# Altium PCB Game_Consol.PcbDoc
Units mil, origin at the board's own origin, x right, y up, seen from the top; angles counter-clockwise.
Board outline 3090.55 x 1732.28 mil, 2 copper layers (Top Layer, Bottom Layer); 53 components, 42 nets, 214 pads, 111 vias.
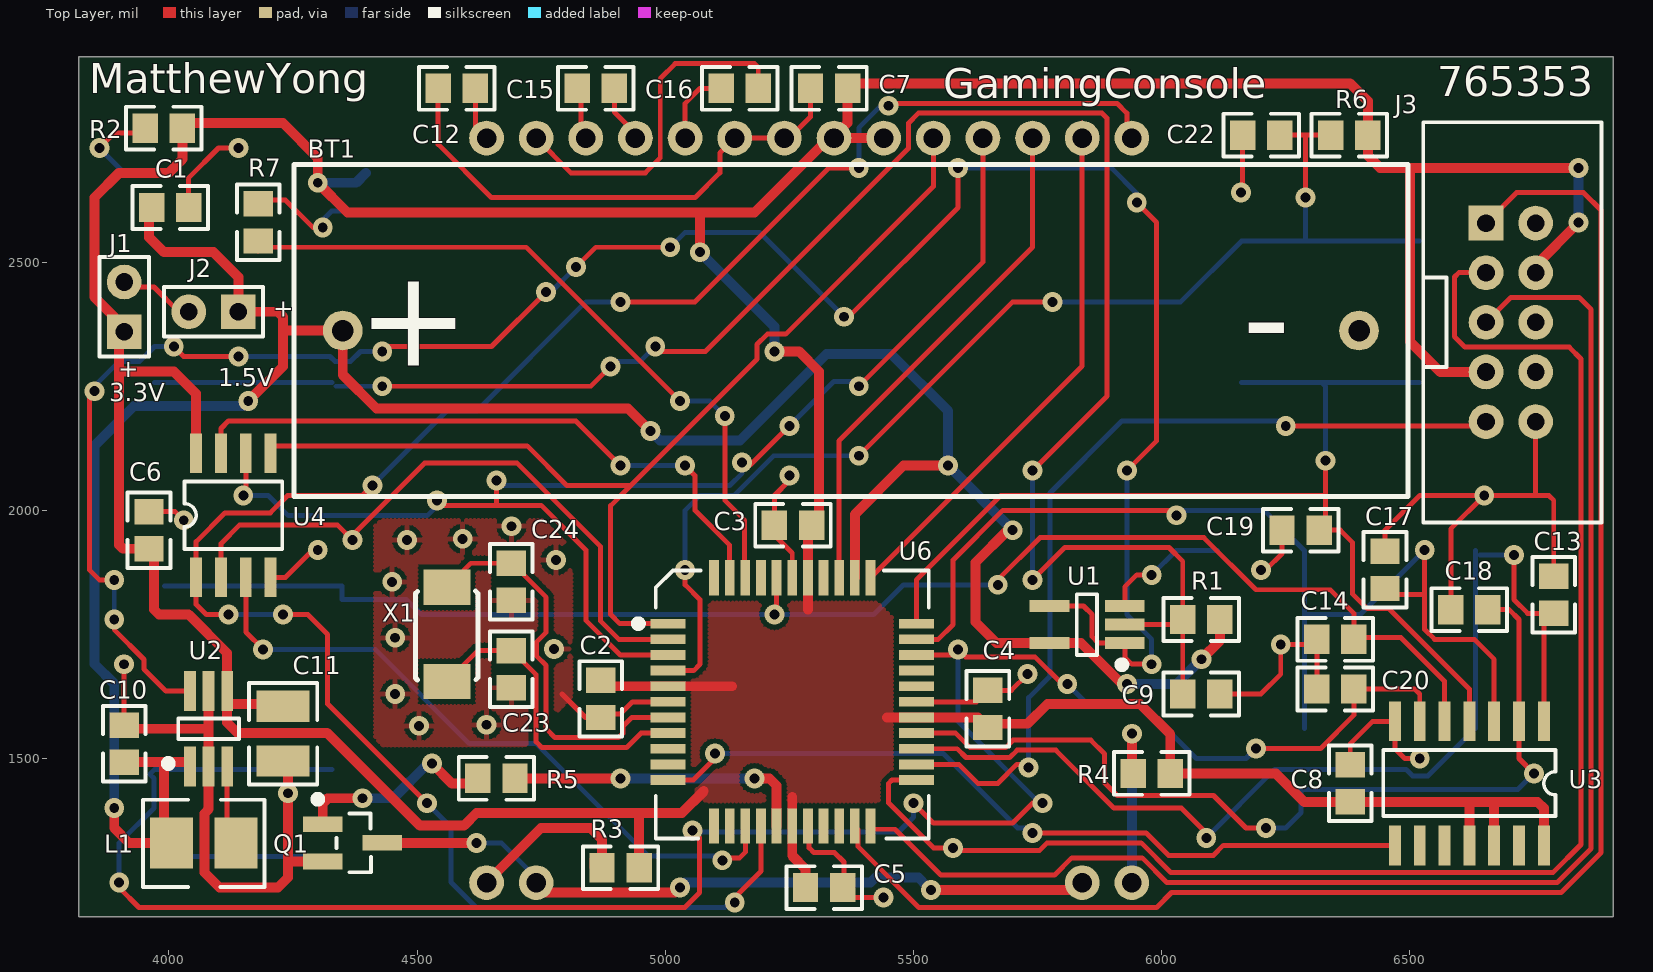
[diagram p0: Top Layer view]
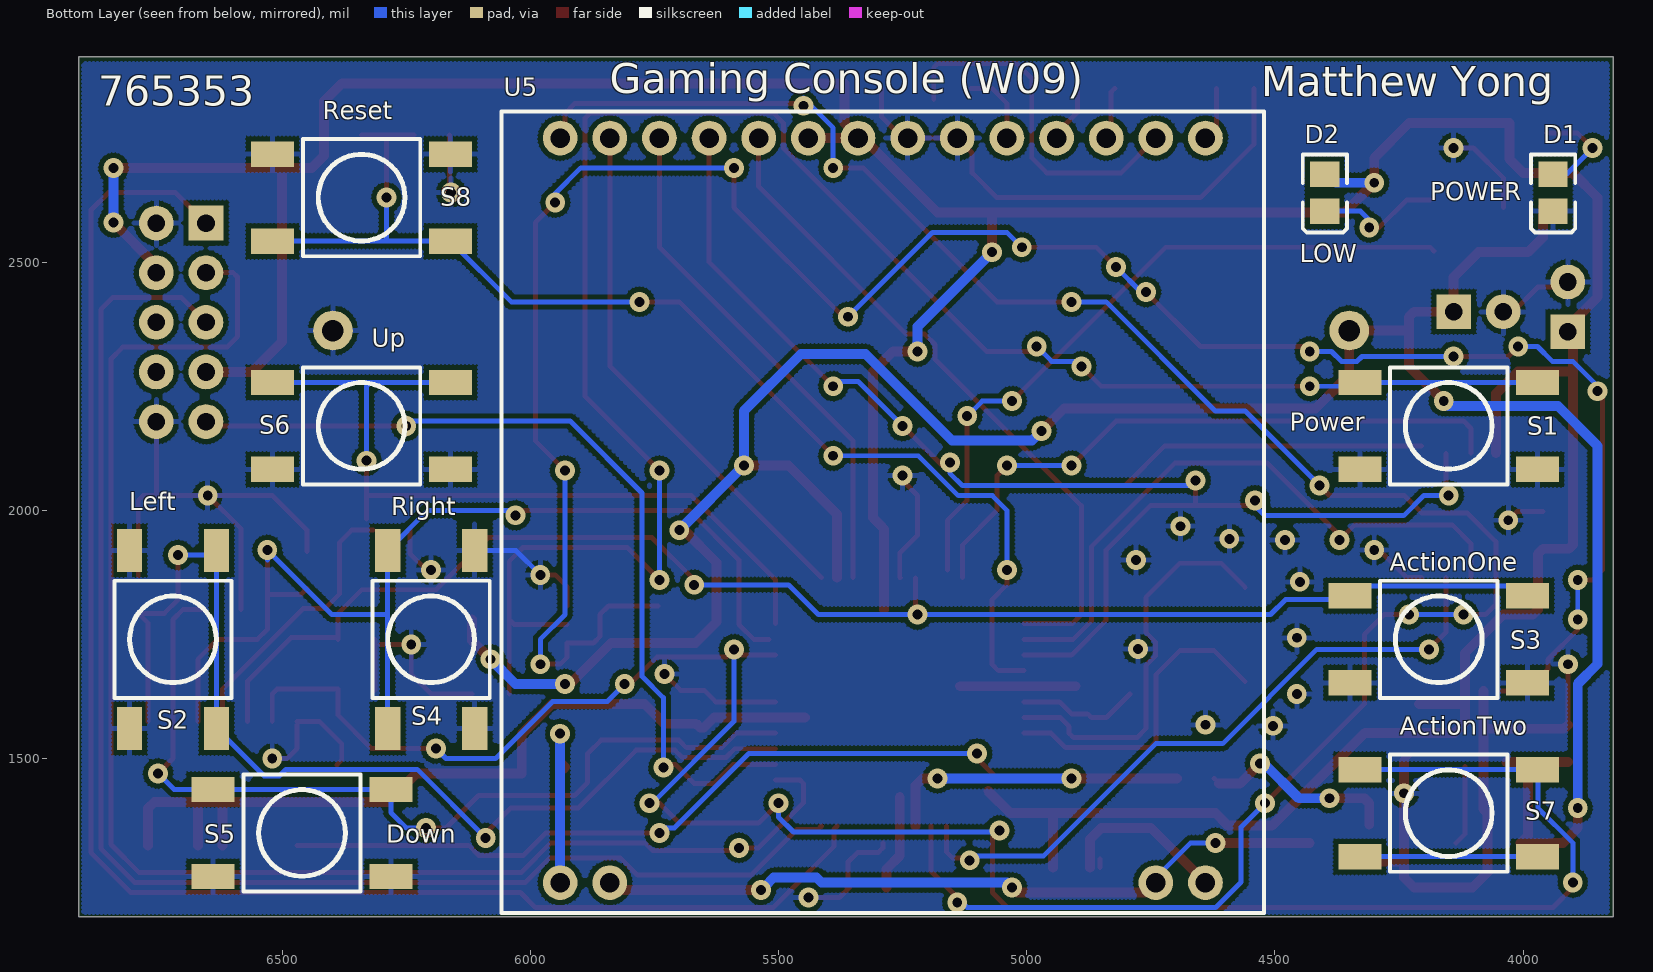
[diagram p1: Bottom Layer view, seen from below]
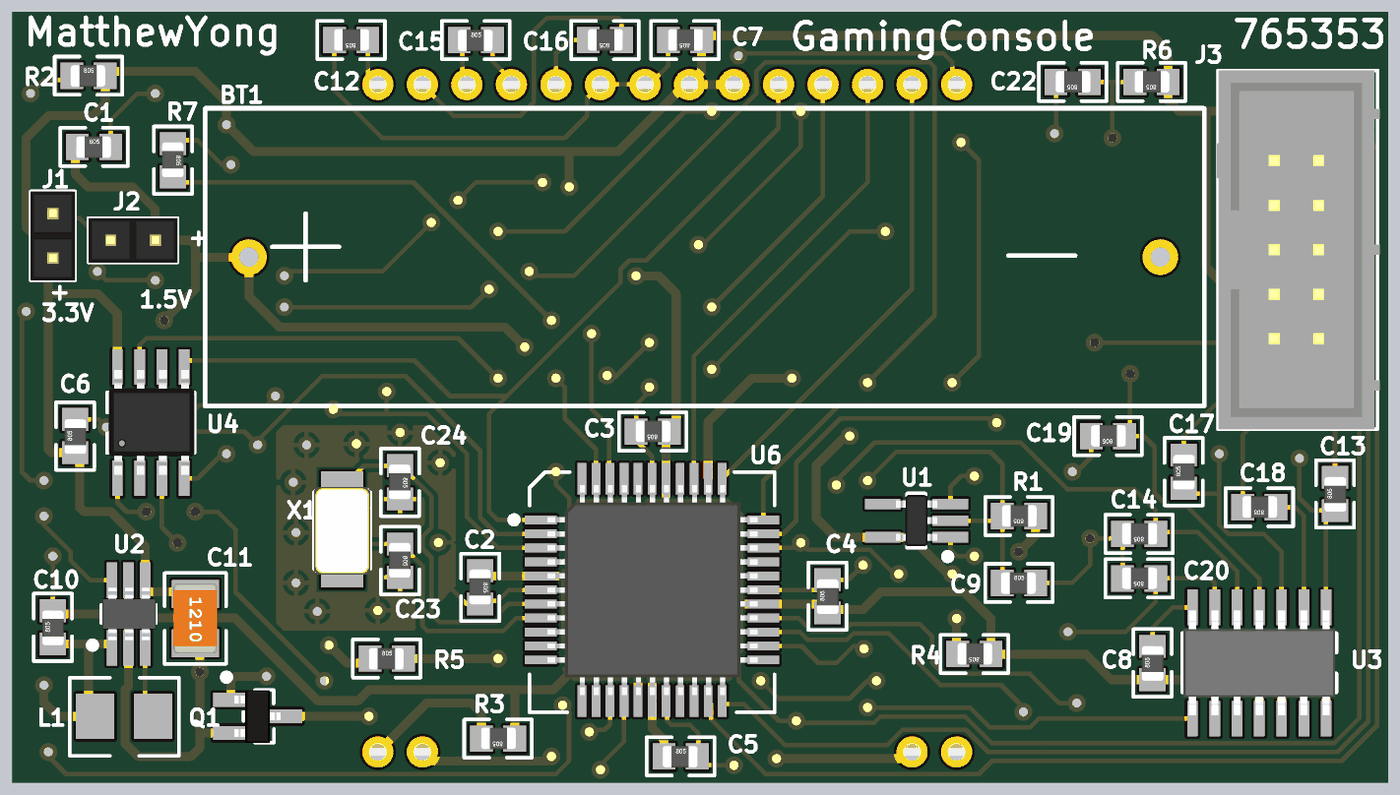
[diagram p2: 3D render of the assembled board from above, using the file's embedded part models]
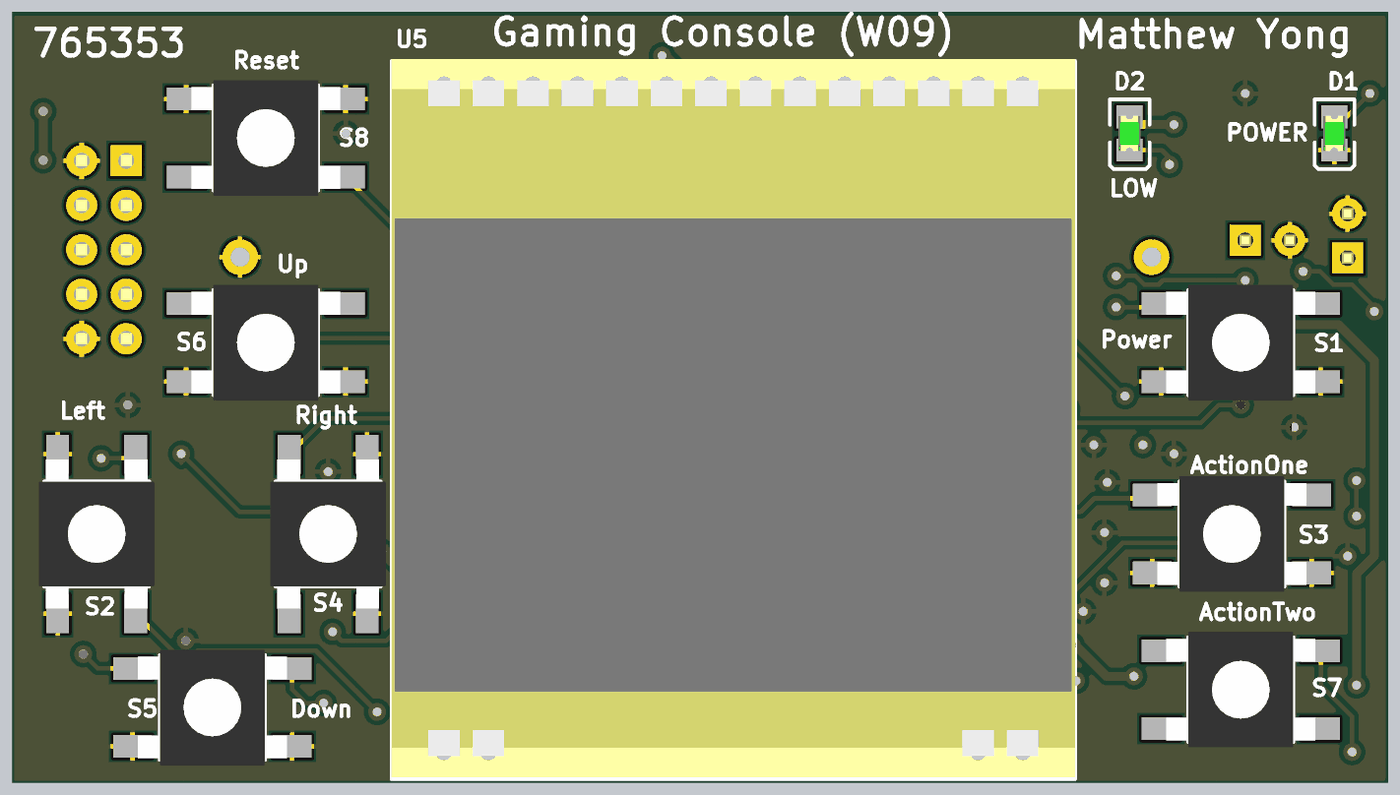
[diagram p3: 3D render of the assembled board from below, using the file's embedded part models]

## Layer stack, top to bottom
Top Solder: solder mask 0.4, Solder Resist, Dk 3.5
Top Layer: signal copper 1.4
Dielectric1: dielectric 12.6, FR-4, Dk 4.8
Bottom Layer: signal copper 1.4
Bottom Solder: solder mask 0.4, Solder Resist, Dk 3.5

## Board outline
3818.9,1181.1 3818.9,2913.39 6909.45,2913.39 6909.45,1181.1

## Design rules (kind name [scope] priority, off if disabled: settings)
Clearance [All] p1: gap=10
ComponentClearance [All] p1 off: gap=10 collisioncheckmode=3 verticalgap=10 showdistances=FALSE
DiffPairsRouting [All] p1: maxlimit=20 minlimit=10 mostfreqgap=10 toplayer_minwidth=15 toplayer_maxwidth=15 toplayer_prefwidth=15 bottomlayer_minwidth=15 bottomlayer_maxwidth=15 bottomlayer_prefwidth=15 maxuncoupledlength=500
FabricationTestPointUsage TestPointUsage [All] p1: valid=0 allowmultiple=FALSE
FabricationTestpoint Testpoint [All] p1: side=3 testpointundercomponent=TRUE minsize=40 maxsize=100 preferedsize=60 minholesize=0 maxholesize=40 preferedholesize=32 testpointgrid=1 allowsidetop=TRUE allowsidebottom=TRUE usegrid=TRUE gridtolerance=0.01
Height [All] p1: minheight=0 maxheight=7874.02 prefheight=500
HoleSize [All] p1: absolutevalues=TRUE maxlimit=199 minlimit=15 maxpercent=80.000 minpercent=20.000
MinimumAnnularRing [All] p1: minimumring=5
PolygonConnect [All] p1: connectstyle=Relief reliefconductorwidth=10 reliefentries=4 polygonreliefangle="90 Angle" airgapwidth=10
RoutingVias [All] p1: holewidth=20 width=40 viastyle="Through Hole" minholewidth=20 minwidth=40 maxholewidth=20 maxwidth=40
SilkToSolderMaskClearance SilkscreenOverComponentPads [IsPad] p1: minsilkscreentomaskgap=10 clearancetoexposedcopper=TRUE
SolderMaskExpansion [All] p1: expansion=6
Width [All] p1: maxlimit=1000 minlimit=6 preferedwidth=10 minimp=50.000000 maximp=50.000000 favimp=50.000000
23 further rules are at their usual default settings.

## Classes and differential pairs
component class Game_Consol_Top: C12 C13 C14 C15 C16 C17 C18 C19 C20 C22 C23 C24 D2 J3 Q1 R3 R4 R5 R6 R7 S2 S3 S4 S5 S6 S7 S8 U3 U4 U5 U6 X1
component class Game_Consol_Power: BT1 C1 C2 C3 C4 C5 C6 C7 C8 C9 C10 C11 D1 J1 J2 L1 R1 R2 S1 U1 U2

## Components (designator, comment, footprint, x,y, rotation, side; value= is the part's Value field where it differs from the comment)
BT1 "1.5v" BATT_HOLDER 5374.02,2362.2 r180 top
C1 "100nF" 0805 4002.6,2610 r0 top
C2 "100nF" 0805 4870,1620 r270 top
C3 "100nF" 0805 5257.4,1970 r180 top
C4 "100nF" 0805 5650,1600 r90 top
C5 "100nF" 0805 5320,1240 r0 top
C6 "100nF" 0805 3960,1960 r90 top
C7 "100nF" 0805 5330,2850 r180 top
C8 "100nF" 0805 6380,1450 r90 top
C9 "100nF" 0805 6080,1630 r0 top
C10 "1uF" 0805 3910,1530 r90 top
C11 "22uF" 1210 4230,1550 r270 top
C12 "1uF" 0805 4580,2850 r180 top
C13 "100nF" 0805 6790,1830 r90 top
C14 "100nF" 0805 6350,1740 r180 top
C15 "1uF" 0805 4860,2850 r0 top
C16 "1uF" 0805 5150,2850 r180 top
C17 "100nF" 0805 6450,1880 r90 top
C18 "100nF" 0805 6620,1800 r180 top
C19 "100nF" 0805 6280,1960 r180 top
C20 "100nF" 0805 6350,1640 r180 top
C22 "100nF" 0805 6200.79,2755.91 r180 top
C23 "18pF" 0805 4690,1680 r270 top
C24 "18pF" 0805 4690,1856 r270 top
D1 "POWER" 0805D 3940,2640 r90 bottom
D2 "LOW" 0805D 4400,2640 r90 bottom
J1 "3.3V" HDR1X2 3910,2360 r90 top
J2 "1.5V" HDR1X2 4140,2400 r180 top
J3 "JTAG" BOXEDVERT10 6653.54,2578.74 r270 top
L1 "4.7uH" 1210L 4070,1330 r180 top
Q1 "RTR025N03TL" SOT23 4370,1330 r0 top
R1 "10k" 0805 6080,1780 r180 top
R2 "10k" 0805 3990,2770 r0 top
R3 "50" 0805 4910,1280 r180 top
R4 "50" 0805 5980,1470 r180 top
R5 "15" 0805 4660,1460 r0 top
R6 "10k" 0805 6377.95,2755.91 r180 top
R7 "10k" 0805 4180,2580 r270 top
S1 "Power" SPNO_SMD 4150,2170 r180 bottom
S2 "Left" SPNO_SMD 6720,1740 r270 bottom
S3 "ActionOne" SPNO_SMD 4170,1740 r180 bottom
S4 "Right" SPNO_SMD 6200,1740 r90 bottom
S5 "Down" SPNO_SMD 6460,1350 r180 bottom
S6 "Up" SPNO_SMD 6340,2170 r180 bottom
S7 "ActionTwo" SPNO_SMD 4150,1390 r180 bottom
S8 "Reset" SPNO_SMD 6340,2630 r0 bottom
U1 "74AUG1G80" SOT23-5 5850,1770 r180 top
U2 "SC120" SOT23-6 4080,1560 r90 top
U3 "74AHC30" SOIC-14 6620,1450 r270 top
U4 "FM25L04B" SOIC-8 4130,1990 r90 top
U5 "EA DOGS102x-6" "EA DOGS102x" 5290,2000 r180 bottom
U6 "ATMEGA16" QFP-48 5255.91,1614.17 r0 top
X1 "8Mhz" XTAL_FLAT_SMD 4560,1750 r90 top

## Footprints (in the part's own frame and the unit in brackets; to place one, negate y for a bottom-side part, rotate by r counter-clockwise, add the part's x,y. Pads: shape width x height; smd on the part's side, far side on the other; paste and mask are expansions set on the pad)
0805 [mm] "0805 Footprint"
  rect 1.3x1.5 smd: 1(-0.95,0) 2(0.95,0)
  silkscreen extent -1.93,-1.09 1.93,1.09, body extent -1.03,-0.64 0.97,0.61, height 0.8
0805D [mm] "0805 Diode"
  rect 1.3x1.5 smd: A(0.95,0) K(-0.95,0)
  silkscreen extent -2.03,-1.14 1.95,1.12, body extent -1.01,-0.62 1.01,0.63, height 1.1
1210 [mm]
  rect 1.6x2.7 smd: 1(-1.4,0) 2(1.4,0)
  silkscreen extent -2.6,-1.75 2.6,1.75, body extent -2,-1.24 2,1.24, height 1.72
1210L [mm] "Precision Wire Wound Inductor, 2-Leads, Body 3.2x3.2mm, IPC Low Density"
  rect 2.2x2.6 smd: 1(-1.651,0) 2(1.651,0)
  silkscreen extent -3.12,-2.21 3.1,2.26, body extent -1.75,-1.75 1.75,1.75, height 2.2
BATT_HOLDER [mil]
  round 80 hole 43.31: 1(1023.62,0) 2(-1023.62,0)
  silkscreen extent -1122,-335 1122,335
BOXEDVERT10 [mil] "IDC Header 2.54mm Boxed 10 pins"
  rect 70x70 hole 35.43: 1(0,0)
  round 70 hole 35.43: 2(0,100) 3(100,0) 4(100,100) 5(200,0) 6(200,100) 7(300,0) 8(300,100) 9(400,0) 10(400,100)
  silkscreen extent -203,-127 603,232, body extent -204,-129 604,237, height 359
"EA DOGS102x" [mil] "graphics display footprint"
  round 70 hole 39.37: 1(-650,-750) 2(-550,-750) 13(550,-750) 14(650,-750) 15(650,750) 16(550,750) 17(450,750) 18(350,750) 19(250,750) 20(150,750) 21(50,750) 22(-50,750) 23(-150,750) 24(-250,750) 25(-350,750) 26(-450,750) 27(-550,750) 28(-650,750)
  silkscreen extent -768,-811 768,803, body extent -768,-807 768,807, height 213
HDR1X2 [mil] "Connector; Header; 2 Position"
  rect 70x70 hole 35.43: 1(0,0)
  round 70 hole 35.43: 2(100,0)
  silkscreen extent -50,-50 150,50, body extent -50,-50 150,50, height 333
QFP-48 [mm]
  rect 1.8x0.5 smd: 1(-6.35,4) 2(-6.35,3.2) 3(-6.35,2.4) 4(-6.35,1.6) 5(-6.35,0.8) 6(-6.35,0) 7(-6.35,-0.8) 8(-6.35,-1.6) 9(-6.35,-2.4) 10(-6.35,-3.2) 11(-6.35,-4) 23(6.35,-4) 24(6.35,-3.2) 25(6.35,-2.4) 26(6.35,-1.6) 27(6.35,-0.8) 28(6.35,0) 29(6.35,0.8) 30(6.35,1.6) 31(6.35,2.4) 32(6.35,3.2) 33(6.35,4)
  rect 0.5x1.8 smd: 12(-4,-6.35) 13(-3.2,-6.35) 14(-2.4,-6.35) 15(-1.6,-6.35) 16(-0.8,-6.35) 17(0,-6.35) 18(0.8,-6.35) 19(1.6,-6.35) 20(2.4,-6.35) 21(3.2,-6.35) 22(4,-6.35) 34(4,6.35) 35(3.2,6.35) 36(2.4,6.35) 37(1.6,6.35) 38(0.8,6.35) 39(0,6.35) 40(-0.8,6.35) 41(-1.6,6.35) 42(-2.4,6.35) 43(-3.2,6.35) 44(-4,6.35)
  silkscreen extent -8,-6.98 6.98,6.73, body extent -5.97,-6 6.03,6, height 1.13
SOIC-8 [mil] "SOIC-8 Footprint"
  rect 80x24 smd: 1(-125,75) 2(-125,25) 3(-125,-25) 4(-125,-75) 5(125,-75) 6(125,-25) 7(125,25) 8(125,75)
  silkscreen extent -68,-98 68,98, body extent -117,-98 119,94, height 67
SOIC-14 [mil] "SOIC-14 Footprint"
  rect 80x24 smd: 1(-125,150) 2(-125,100) 3(-125,50) 4(-125,0) 5(-125,-50) 6(-125,-100) 7(-125,-150)
  rect 80x24.02 smd: 8(125,-150) 9(125,-100) 10(125,-50) 11(125,0) 12(125,50) 13(125,100) 14(125,150)
  silkscreen extent -67,-173 66,173, body extent -118,-170 118,170, height 61
SOT23 [mil] "SOT23, 3-Leads, Body 3.0x2.5mm (max), Pitch 0.95mm, IPC Low Density"
  rect 80.24x31.5 smd: 1(-60,37.4)
  rect 80x31.5 smd: 2(-60,-37.4) 3(60,0)
  silkscreen extent -75,-59 37,93, body extent -52,-59 52,59, height 43
SOT23-5 [mm]
  rect 2.032x0.6 smd: 1(-1.929,0.95) 2(-1.929,0) 3(-1.929,-0.95) 4(1.929,-0.95) 5(1.929,0.95)
  silkscreen extent -1.9,-1.55 0.53,2.18, body extent -1.17,-1.46 1.17,1.46, height 1.02
SOT23-6 [mm]
  rect 2.032x0.6 smd: 1(-1.929,0.95) 2(-1.929,0) 3(-1.929,-0.95) 4(1.929,-0.95) 5(1.929,0) 6(1.929,0.95)
  silkscreen extent -1.9,-1.55 0.53,2.18, body extent -1.5,-1.56 1.5,1.49, height 1.42
SPNO_SMD [mm] "SP NO SMD Tactile switch"
  rect 2.2x1.3 smd: 1(-4.55,-2.225) 2(4.55,-2.225) 3(-4.55,2.225) 4(4.55,2.225)
  silkscreen extent -3,-3 3,3, body extent -4.25,-3.3 4.25,3.3, height 4.32
XTAL_FLAT_SMD [mm]
  rect 1.8x2.4 smd: 1(-2.412,0) 2(2.413,0)
  silkscreen extent -2.33,-1.59 2.21,1.6, body extent -2.58,-1.6 2.42,1.6, height 1.02

## Part data
BT1: library part BAT, "Battery Holder AA 1.5v"
C1 C2 C3 C4 C5 C6 C7 C8 C9 C10 C12 C13 C14 C15 C16 C17 C18 C19 C20 C22 C23 C24: library part "C 0805", "Capacitor 100nF"
C11: library part "C 1210", "Capacitor 22uF"
D1: library part "LED GREEN", "Light Emitting Diode"
D2: library part "LED RED", "Light Emitting Diode"
J1 J2: library part HDR2, "2 Pin Header"
J3: library part JTAG_CON, "JTAG ATMEL connector"
L1: library part "I 1210", "Inductor 4.7uH"
Q1: library part MOSFET-N, "N-Channel MOSFET"
R1 R2 R3 R4 R5 R6 R7: library part R, "Resistor"
S1 S2 S3 S4 S5 S6 S7 S8: library part SW-PB, "Push Button Switch"
U1: "Inverted single D flip flop"
U2: "Regulator Low Voltage"
U3: "1 x 8 Input NAND gate"
U4: "FRAM 4Kb Memory"
U5: "LCD 102x64-pixel with backlight"
U6: "ATMEGA16 Microcontroller"
X1: library part XTAL, "Crystal Oscillator"

## Via types
v1: diameter 40, hole 20, Top Layer to Bottom Layer, tented both sides, 111 vias

## Nets (pads, with @x,y where several pads share a name; then routed paths per layer and width w, separated by ;. In a path a pad name is that pad's centre, name@x,y a point inside that pad or via, vN(x,y) a via of type N, cw(c..) or ccw(c..) an arc to the next point about the centre after c; other vN are vias at no path point)
A1+: R4.2 U5.1 | length 369.4
  Top Layer w10: R4.2@5940,1472.6 R4.2
  Top Layer w20: R4.2@5940,1472.6 5930,1482.6 5940,1492.6 v1(5940,1550)
  Bottom Layer w20: U5.1@5940,1270 v1(5940,1550)
A2+: R3.2 U5.14 | length 362.3
  Top Layer w10: R3.2@4852.6,1280 R3.2@4852.6,1297.4
  Top Layer w20: U5.14 4750,1360 4850,1360 4872.6,1337.4 R3.2
ACTIONONE: C14.1 S3.3 S3.4 U3.5 U6.40 | length 2999.2
  Top Layer w10: v1(5220,1790) 5222.82,1790 5224.41,1788.41 U6.40 ; v1(5670,1850) 5670,1860 5755,1945 6085,1945 6190,1840 6340,1840 6387.4,1792.6 C14.1 ; C14.1@6391.15,1743.75 6482.03,1743.75 6570,1655.78 U3.5
  Bottom Layer w10: S3.4@3990.87,1847.6 4349.13,1847.6 4349.13,1820 4478.87,1820 4508.87,1790 v1(5220,1790) 5420,1790 5480,1850 v1(5670,1850)
ACTIONTWO: C20.1 S7.3 S7.4 U3.6 U6.31 | length 4381
  Top Layer w10: v1(3900,1250) 3900,1240 3940,1200 5039.5,1200 5069.5,1230 5069.5,1340.5 v1(5055,1355) ; v1(5500,1410) 5540,1370 5700,1370 5740,1410 v1(5760,1410) ; U6.31 v1@5578.66,1708.66 ; v1(5590,1720) 5605,1705 5744.5,1705 5799.5,1650 v1(5810,1650) ; v1(6190,1520) 6320,1520 6387.4,1587.4 C20.1 6510,1640 6520,1630 U3.6
  Bottom Layer w10: v1(3900,1250) 3900,1330 3970,1400 3970,1460 3961.63,1468.37 S7.4 S7.3 ; v1(5055,1355) 5055,1365 5068,1352 5470,1352 5500,1382 v1(5500,1410) ; v1(5590,1720) 5590,1574.52 5754.52,1410 v1(5760,1410) ; v1(5810,1650) 5845,1615 5955,1615 6070,1500 6170,1500 v1(6190,1520)
"BUTTON INTERRUPT": U3.8 U6.11 | length 1581.1
  Top Layer w10: U6.11 5056.69,1456.69 5100,1500 v1(5100,1510) ; v1(5740,1350) 5968.99,1350 6013.99,1305 6104.5,1305 6124.5,1325 U3.8
  Bottom Layer w10: v1(5100,1510) 5560,1510 5710,1360 v1@5740,1360
CD: U5.26 U6.36 | length 1067
  Top Layer w10: U6.36@5350,1864.57 5350,2140 5740,2530 U5.26@5740,2770
CS: U4.1 U5.28 U6.15 | length 4149.1
  Top Layer w10: v1(4120,1790) 4075.36,1790 4055,1810.36 U4.1 4055,1937 4113,1995 4204.5,1995 4239.5,2030 4390,2030 v1(4410,2050) ; v1(4230,1790) 4280,1790 4320,1750 4320,1610 v1(4520,1410) ; v1(4910,2420) 5060,2420 5330,2690 v1(5390,2690) ; v1(5140,1210) 5140,1220 5192.91,1272.91 U6.15 ; v1(5450,2815) 5455,2820 5910,2820 5930,2800 5930,2760 U5.28
  Bottom Layer w10: v1(4120,1790) v1(4230,1790) ; v1(4410,2050) 4560,2200 4620,2200 4840,2420 v1(4910,2420) ; v1(4520,1410) 4568.08,1361.92 4568.08,1251.21 4619.29,1200 5120,1200 5130,1210 v1(5140,1210) ; v1(5390,2690) 5390,2770.71 v1@5439.29,2820 ; v1(5450,2815) v1@5450,2830.71
DOWNSWITCH: C18.1 S5.3 S5.4 U3.2 U6.26 | length 1847.3
  Top Layer w10: U6.26 5585.09,1551.18 5614.26,1522.01 5685.74,1522.01 5700.74,1537.01 5857.34,1537.01 5885,1509.35 5885,1451.27 5910.79,1425.47 6104.53,1425.47 6170,1360 v1(6210,1360) ; C18.1 6700,1800 6720,1780 U3.2 6720,1500 v1(6750,1470)
  Bottom Layer w10: v1@6213.27,1370 6210,1366.73 v1(6210,1360) 6250,1360 6280.87,1390.87 S5.4 S5.3 6717.6,1437.6 v1(6750,1470)
"ENABLE CONTROL": U1.1 U1.4 U2.6 | length 4603.2
  Top Layer w10: v1(3850,2240) 3840,2230 3840,1880 3860,1860 v1(3890,1860) ; v1(3890,1780) 3890,1759.5 3950,1699.5 3950,1680 3994.07,1635.93 U2.6 ; v1(4010,2330) 4030,2310 v1(4140,2310) ; v1(4430,2320) 4440,2330 4650,2330 v1(4760,2440) ; v1(4820,2490) 4860,2530 v1(5010,2530) ; v1(5360,2390) 5370,2390 5590,2610 v1(5590,2690) ; U1.4@5743.1,1807.4 U1.4 5842.6,1807.4 5860,1790 5860,1745.36 5872.76,1732.6 U1.1 5925.93,1704.07 5940,1690 v1(5980,1690) ; v1(5930,2080) 5990,2140 5990,2580 v1(5950,2620)
  Bottom Layer w10: v1(3850,2240) 3850,2250 3900,2300 3941.21,2300 3971.21,2330 v1(4010,2330) ; v1(3890,1780) v1(3890,1860) ; v1(4140,2310) 4324.82,2310 4334.82,2300 4365.97,2300 4385.97,2320 v1(4430,2320) ; v1(4760,2440) 4770,2440 v1(4820,2490) ; v1(5010,2530) 5040,2560 5190,2560 v1(5360,2390) ; v1(5590,2690) 5898.4,2690 5950,2638.4 v1(5950,2620) ; v1(5930,2080) 5930,1790 5980,1740 v1(5980,1690)
GATE: Q1.1 R5.1 | length 401
  Top Layer w10: R5.1@4612.6,1450 R5.1
  Top Layer w20: Q1.1 4310,1410 4320,1420 v1(4390,1420) ; v1(4530,1490) 4570,1450 R5.1@4612.6,1450
  Bottom Layer w20: v1(4390,1420) 4452,1420 v1@4522,1490
GND: BT1.2 C1.2 C2.2 C3.2 C4.2 C5.2 C6.2 C7.2 C8.2 C9.2 C10.2 C11.2 C12.2 C13.2 C14.2 C17.2 C18.2 C19.2 C20.2 C22.2 C23.2 C24.2 D1.K J1.2 J2.2 J3.2 J3.10 Q1.2 S1.1 S1.2 S2.1 S2.2 S3.1 S3.2 S4.1 S4.2 S5.1 S5.2 S6.1 S6.2 S8.1 S8.2 U1.3 U2.2 U2.5 U3.7 U4.4 U5.20 U5.21 U6.6 U6.18 U6.28 U6.39 | length 5810.6
  Top Layer w10: C10.2 v1(3910,1690) ; J1.2@3910,2470 3930,2450 3970,2450 J2.2@4020,2400 ; C6.2 4012.6,1997.4 v1(4030,1980) ; C1.2 4040,2670 4100,2730 v1(4140,2730) ; U4.4 4235,1865 4290,1920 v1(4300,1920) ; C11.2@4230,1504.88 C11.2@4240,1494.88 ; C12.2 4542.6,2737.4 4650,2630 5060,2630 5110,2680 5110,2720 U5.20 U5.21 5250,2750 5292.6,2792.6 C7.2 ; 4792,1630 4839.4,1582.6 C2.2 4877.4,1590 4910,1590 4934.17,1614.17 U6.6 ; v1(5250,2070) 5250,2060 5220,2030 C3.2 5220,1950 5255.91,1914.09 U6.39 U6.39@5254.68,1864.17 ; U6.18@5290,1330 5290,1320 5299.21,1310.79 5340.79,1310.79 5360,1291.57 5360,1242.6 C5.2@5362.6,1240 ; C5.2 5377.4,1220 v1(5440,1220) v1@5430,1210 ; U6.28 5626.77,1614.17 C4.2 5697.4,1637.4 v1(5730,1670) ; U1.3 5925.93,1845.93 5950,1870 v1(5980,1870) ; C9.2 6200,1630 6240,1670 v1(6240,1730) C14.2@6302.6,1730 ; v1(6160,2640) 6163.39,2643.39 C22.2 ; v1(6200,1880) 6210,1880 6242.6,1912.6 C19.2 ; C20.2@6312.6,1638.47 C20.2 C14.2 ; C8.2@6390,1487.4 6380,1497.4 6380,1530 6425,1575 U3.7 ; C17.2 6450,1960 6520,2030 v1(6650,2030) ; U3.7@6470,1567.4 6470,1520 6490,1500 v1(6520,1500) ; C18.2 6582.6,1962.6 v1(6650,2030) ; 6753.54,2033.54 J3.10 ; C13.2 6790,2020 6780,2030 v1(6650,2030)
  Top Layer w20: C10.2 3917.4,1560 4080,1560 ; U2.5 4080,1560 ; 4240,1292.6 Q1.2 ; C11.2@4240,1494.88 v1(4240,1430) 4240,1260 4220,1240 4102.23,1240 4071.69,1270.53 4071.69,1389.47 4080,1397.77 U2.2 4080,1560
  Bottom Layer w10: v1(3910,1690) v1@3920,1700 ; v1(5980,1870) 6029.13,1919.13 S4.2
  other v1: 4504,1565.92 4640,1568 4456,1630 4776,1720.79 4456,1743.26 4450,1856 4780,1900 4480,1940 4592,1942.63 4690,1968
HOLD: U4.7 U6.43 | length 1291.6
  Top Layer w10: U4.7 4105,2165 4120,2180 4820,2180 v1(4910,2090) ; v1(5040,2090) 5060,2070 5060,1999.84 5129.92,1929.92 U6.43
  Bottom Layer w10: v1(4910,2090) v1(5040,2090)
"LCD CONTROL": R5.2 U6.16 | length 614.4
  Top Layer w20: R5.2 v1(4910,1460) ; v1(5180,1460) 5210,1460 5224.41,1445.59 U6.16
  Bottom Layer w20: v1(4910,1460) v1(5180,1460)
"LCD RESET": U5.27 U6.34 | length 1092.5
  Top Layer w10: U6.34 5840,2290.79 U5.27@5840,2780
LEFTSWITCH: C13.1 S2.3 S2.4 U3.1 U6.25 | length 2155.6
  Top Layer w10: U6.25 5588.3,1519.68 5605.98,1502.01 5694.02,1502.01 5709.02,1517.01 5786.93,1517.01 5903.93,1400 6040,1400 6090,1350 v1(6090,1340) ; v1(6710,1910) 6710,1820 6737.4,1792.6 C13.1 6770,1772.6 U3.1
  Bottom Layer w10: v1(6090,1340) 6228.19,1478.19 6492.31,1478.19 6505.5,1465 6536.54,1465 S2.4 S2.3 ; S2.3@6641.54,1910 v1(6710,1910)
LOWBATT: R7.2 U6.42 | length 1424.6
  Top Layer w10: R7.2@4180,2522.6 4187.4,2530 4720,2530 v1(5030,2220) ; v1(5120,2190) 5120,2020 5160,1980 U6.42@5160,1880
  Bottom Layer w10: v1@5040,2210 v1(5030,2220) 5090,2220 v1(5120,2190)
LX: L1.1 U2.3 | length 161.4
  Top Layer w10: U2.3 4117.4,1347.6 L1.1
MISO: U4.2 U6.2 | length 1301.7
  Top Layer w10: U4.2 4105,1933 4142,1970 4340,1970 v1(4370,1940) 4370,1950 4515,2095 4701.83,2095 4870,1926.83 4870,1776.57 4906.41,1740.16 U6.2
MOSI: U4.5 U5.24 U6.1 | length 2153
  Top Layer w10: U4.5@4205,2130 4721.72,2130 4801.72,2050 4930.5,2050 ; U6.1 4908.35,1771.65 4890,1790 4890,2009.5 4930.5,2050 ; U5.24@5540,2770 5540,2652.52 5242.48,2355 5205.5,2355 5185,2334.5 5185,2304.5 4930.5,2050
NetC12_1: C12.1 U5.15 | length 109.4
  Top Layer w10: C12.1 4617.4,2772.6 U5.15
NetD1_A: D1.A R2.1 | length 206.8
  Top Layer w10: v1(3860,2730) 3890,2760 R2.1@3952.6,2760
  Bottom Layer w10: v1(3860,2730) 3912.6,2677.4 D1.A
NetD2_K: D2.K R7.1 | length 242.5
  Top Layer w10: R7.1@4187.6,2625 4235,2625 4290,2570 v1(4310,2570)
  Bottom Layer w10: v1@4310,2585 4327.6,2602.6 D2.K
NetS7_1: S7.1 S7.2 | length 358.3
  Bottom Layer w10: S7.2 S7.1
"NPN OUT": Q1.3 U5.2 U5.13 | length 1519
  Top Layer w10: U5.13 U5.13@4760,1230 ; U5.2@5825,1235 U5.2
  Top Layer w20: Q1.3 v1(4620,1330) ; U5.13@4760,1230 5020,1230 v1(5030,1240) ; v1(5535.5,1235) U5.2@5825,1235
  Bottom Layer w10: v1(4620,1330) 4670,1330 4740,1260 U5.13 ; v1(5535.5,1235) v1@5535.5,1242.5 ; U5.2@5820,1250 U5.2@5840,1270
  Bottom Layer w20: v1(5030,1240) 5040,1250 5413.43,1250 5423.43,1260 5510,1260 5527.5,1242.5 v1@5535.5,1242.5
POWERUP: C9.1 R1.2 S1.3 S1.4 U1.2 | length 3902.8
  Top Layer w10: v1(4430,2250) 4850,2250 v1(4890,2290) ; v1(4980,2330) 4990,2320 5080.71,2320 5490,2729.29 5490,2780 5510,2800 5880,2800 5890,2790 5890,2230 v1(5740,2080) ; v1(5740,1860) 5805,1925 6015,1925 6042.6,1897.4 R1.2 ; U1.2 6032.6,1770 R1.2 ; C9.1 R1.2
  Bottom Layer w10: S1.4 S1.3 ; S1.3@4336.73,2250 v1(4430,2250) ; v1(4890,2290) 4900,2300 4950,2300 v1(4980,2330) ; v1(5740,1860) v1(5740,2080)
RESET: C22.1 R6.2 S8.3 S8.4 U6.4 | length 2415.6
  Top Layer w10: U6.4 5057.17,1677.17 5070,1690 5070,1820 5040,1850 v1(5040,1880) ; v1(5390,2110) 5700,2420 v1(5780,2420) ; C22.1@6234.09,2755.91 C22.1 6290,2755.91 ; v1(6290,2630) 6290,2755.91 ; R6.2 6290,2755.91
  Bottom Layer w10: v1(5040,1880) 5040,2000 5069.5,2029.5 5137.78,2029.5 5218.28,2110 v1(5390,2110) ; v1(5780,2420) 6038.46,2420 S8.3 6290,2542.4 ; v1(6290,2630) 6290,2542.4 ; S8.4 6290,2542.4
RIGHTSWITCH: C17.1 S4.3 S4.4 U3.3 U6.32 | length 2203.4
  Top Layer w10: U6.32@5519.37,1740 5550,1740 5580,1770 5580,1900 5680,2000 6020,2000 v1(6030,1990) ; C17.1 6462.6,1830 6530,1830 ; v1(6530,1920) 6530,1830 ; U3.3 6670,1700 6630,1740 6550,1740 6530,1760 6530,1830
  Bottom Layer w10: v1(6030,1990) 6040,2000 6206.73,2000 S4.4 6287.6,1790 ; S4.3 6287.6,1790 ; 6530,1900 v1(6530,1920) 6400,1790 6287.6,1790
SCK: U4.6 U5.25 U6.3 | length 2696.4
  Top Layer w10: v1(4150,2030) 4155,2035 U4.6 ; v1(4540,2020) 4550,2010 4660,2010 ; v1(4660,2060) 4660,2010 ; U6.3 4909.62,1708.66 4840,1778.28 4840,1920 4750,2010 4660,2010 ; v1(5155,2096.21) 5150,2091.21 5171.21,2091.21 v1(5250,2170) ; v1(5390,2250) 5640,2500 U5.25
  Bottom Layer w10: v1(4150,2030) 4200,2030 4240.59,1989.41 4520.59,1989.41 4540,2008.82 v1(4540,2020) ; v1(4660,2060) 4670,2050 5130,2050 5155,2075 v1(5155,2096.21) ; v1(5250,2170) 5340,2260 5380,2260 v1(5390,2250)
TCK: J3.1 U6.21 | length 3203.4
  Top Layer w10: U6.21 5388.54,1357.52 5388.54,1322.53 5511.07,1200 5990,1200 6020,1230 6804.79,1230 6885,1310.21 6885,2605 6850,2640 6714.8,2640 J3.1
TDI: J3.9 U6.24 | length 1765.1
  Top Layer w10: U6.24 5591.51,1488.19 5629.7,1450 5670.3,1450 5708.49,1488.19 5725.83,1488.19 v1(5732.01,1482.01) ; v1(6250,2170) J3.9@6644.8,2170
  Bottom Layer w10: v1(5732.01,1482.01) 5732.01,1622.51 5775,1665.5 5775,2035 5920,2180 6240,2180 v1(6250,2170)
TDO: J3.3 U6.23 | length 3036.3
  Top Layer w10: U6.23 5456.69,1456.69 5450,1450 5450,1410.5 5540.5,1320 v1(5580,1320) 5580,1310 5585,1315 5754.5,1315 5769.5,1330 5958.99,1330 6018.99,1270 6788.22,1270 6845,1326.78 6845,2305 6821.26,2328.74 6611.26,2328.74 6590,2350 6590,2470 6598.74,2478.74 J3.3
TMS: J3.5 U6.22 | length 2884.8
  Top Layer w10: U6.22 5420,1357.56 5462.94,1357.56 5555.5,1265 5784.29,1265 5819.29,1300 5960.71,1300 6010.71,1250 6796.51,1250 6865,1318.49 6865,2405 6841.26,2428.74 6703.54,2428.74 J3.5
UPSWITCH: C19.1 S6.3 S6.4 U3.4 U6.33 | length 2180
  Top Layer w10: U6.33 5505.91,1859.64 5676.27,2030 6330,2030 ; C19.1 6360,1960 6385,1935 6385,1831.27 6414.26,1802.01 6457.99,1802.01 6620,1640 U3.4 ; C19.1@6330,1982.6 6330,2030 ; v1(6330,2100) 6330,2030
  Bottom Layer w10: S6.4 6322.4,2257.6 ; v1(6330,2100) 6330,2250 6322.4,2257.6 ; S6.3 6322.4,2257.6
VB0+: C15.2 U5.18 | length 117.6
  Top Layer w10: C15.2 4897.4,2802.6 4940,2760 U5.18
VB0-: C15.1 U5.17 | length 107.2
  Top Layer w10: C15.1 4830,2842.6 4830,2760 U5.17
VB1+: C16.2 U5.19 | length 155
  Top Layer w10: U5.19 5040,2820 5070,2850 C16.2
VB1-: C16.1 U5.16 | length 729.5
  Top Layer w10: U5.16 4810,2680 4960,2680 4990,2710 4990,2870 5020,2900 5180,2900 5187.4,2892.6 C16.1 C16.1@5187.4,2827.4
VBAT: BT1.1 C1.1 C10.1 J2.1 L1.2 R1.1 U1.5 U2.1 U6.35 | length 5281.8
  Top Layer w20: v1(3890,1400) 3890,1360 3920,1330 L1.2 3990,1345 3990,1492.6 ; C10.1 3990,1492.6 ; C1.1@3960,2610 3960,2550 3990,2520 4090,2520 4140,2470 J2.1 4220,2400 4230,2390 4230,2290 v1(4160,2220) ; U2.1@4034.07,1492.6 3990,1492.6 ; 4237.8,2362.2 BT1.1 4350.39,2273.04 4418.43,2205 4925,2205 v1(4970,2160) ; U6.35 5381.89,1991.89 5480,2090 v1(5570,2090) ; v1(5700,1960) 5690,1960 5625,1895 5625,1775 5667.4,1732.6 U1.5 5837.4,1732.6 5920,1650 v1(5930,1650) ; v1(6080,1700) 6117.4,1737.4 R1.1
  Bottom Layer w20: v1(3890,1400) 3890,1650.5 3850,1690.5 3850,2130 3930,2210 4150,2210 v1(4160,2220) ; v1(4970,2160) 4989.5,2140.5 5150.5,2140.5 5325,2315 5455,2315 5570,2200 v1(5570,2090) v1(5700,1960) ; v1(5930,1650) 6030,1650 v1(6080,1700)
VCC: C2.1 C3.1 C4.1 C5.1 C6.1 C7.1 C8.1 C11.1 D2.A J1.1 J3.4 J3.7 R2.2 R3.1 R4.1 R6.1 U2.4 U3.11 U3.12 U3.14 U4.8 U5.22 U5.23 U6.5 U6.17 U6.27 U6.38 | length 10367.8
  Top Layer w20: R2.2@4027.4,2780 4027.4,2707.4 4000,2680 3900,2680 3850,2630 3850,2429.29 3900,2379.29 3900,2280 ; R2.2@4030,2780 4230,2780 4300,2710 v1(4300,2660) 4360,2600 5070,2600 ; U4.8 4055,2235 4010,2280 3900,2280 ; C11.1@4210,1610 4120,1610 4117.4,1612.6 U2.4 ; 4901.73,1645.67 U6.5 5134.33,1645.67 ; R3.1 4947.4,1390 ; v1(5070,2520) 5070,2600 ; 5077.59,1434.16 5033.43,1390 4947.4,1390 ; v1(5220,2320) 5270,2320 5310,2280 5310,1985.2 C3.1 5287.4,1962.6 U6.38 5287.4,1800.6 ; 5255.91,1422.5 U6.17 5255.91,1304.09 5282.6,1277.4 C5.1 ; C7.1@5367.4,2860 C7.1 5367.4,2780 5337.4,2750 U5.22@5330,2750 ; C7.1@5370,2850 5380,2860 6380,2860 6415.35,2824.65 R6.1 6415.35,2714.65 6440,2690 6500,2690 ; U5.23 U5.22 U5.22@5330,2750 ; 5446.68,1582.68 U6.27 5629.92,1582.68 C4.1 5658.6,1562.6 5666,1570 5730,1570 5770,1610 5956.57,1610 6017.4,1549.17 R4.1 6230,1470 6287.4,1412.6 6670,1412.6 ; U3.11 6620,1408.9 ; J3.7 6561.26,2278.74 6500,2340 6500,2690 ; U3.12 6670,1412.6 ; J3.4@6753.54,2493.54 v1(6840,2580) ; U3.14 6770,1400 6757.4,1412.6 6670,1412.6 ; v1(6840,2690) 6500,2690 ; 3900,2280 3900,1930 3907.4,1922.6 C6.1 3970,1912.6 3970,1800.5 3980.5,1790 4040,1790 4117.4,1712.6 U2.4 ; U2.4 4117.4,1572.6 4138.62,1551.38 4319.12,1551.38 4505.5,1365 4595,1365 4620,1390 4947.4,1390 ; 5070,2600 5180,2600 U5.22@5330,2750
  Bottom Layer w20: v1(4300,2660) 4377.4,2660 D2.A@4397.4,2680 ; v1(5070,2520) 5220,2370 v1(5220,2320) ; v1(6840,2580) 6840,2670
WP: U4.3 U6.14 | length 1381.8
  Top Layer w10: U4.3 4155,1755 v1(4190,1720) ; v1(5115,1295) 5120,1300 5150,1300 5161.42,1311.42 U6.14
  Bottom Layer w10: v1(4190,1720) 4415.5,1720 4605.5,1530 4740,1530 4966,1304 5108,1304 v1@5115,1297 ; v1(5115,1295) v1@5115,1297 ; v1@5115,1297 5120,1302 v1@5115,1297
XTAL1: C23.1 U6.8 X1.1 | length 644
  Top Layer w10: X1.1 4622.38,1717.4 C23.1 4691.53,1717.4 4740,1668.93 4740,1533.72 4751.72,1522.01 4922.01,1522.01 4951.18,1551.18 U6.8
XTAL2: C24.1 U6.7 X1.2 | length 807.3
  Top Layer w10: X1.2 4608.42,1893.4 C24.1 4691.53,1893.4 4760,1824.93 4760,1754.29 4741,1735.29 4741,1706.29 4760,1687.29 4760,1560 4777.99,1542.01 4905.74,1542.01 4914.53,1550.79 4914.53,1564.53 4932.68,1582.68 U6.7
pads on no net: J3.6 J3.8 U3.9 U3.10 U3.13 U6.9 U6.10 U6.12 U6.13 U6.19 U6.20 U6.29 U6.30 U6.37 U6.41 U6.44

## Polygon pours and split planes (outlines as drawn)
VCC on Top Layer "VCCPlane" (hatched 90Degree grid 8 track 10, remove dead copper, pour order 10): 5019.68,1753.42 5116.65,1850.39 5389.61,1850.39 5492.13,1747.87 5492.13,1476.38 5393.7,1377.95 5118.11,1377.95 5019.68,1476.38
GND on Top Layer "GNDPlane" (hatched 90Degree grid 8 track 10, remove dead copper, pour order 14): 4810.39,1980 4416.69,1980 4416.69,1527.24 4568,1527.24 4718,1527.24 4810.39,1625.67
GND on Bottom Layer "GNDPlane" (hatched 90Degree grid 8 track 10, remove dead copper, pour order 28): 3830,2900 6900,2900 6900,1190 3830,1190

## Silkscreen, mask and mechanical layers (free items; w line width, h text height)
Top Overlay:
  text "MatthewYong" at 3840,2840 h60
  text "765353" at 6555.12,2834.65 h60
  text "GamingConsole" at 5560,2830 h60
  text "+" at 4210,2390 h36
  text "+" at 3897.9,2267.9 h36
Bottom Overlay:
  text "Gaming Console (W09)" at 5840,2840 h60
  text "Matthew Yong" at 4527.56,2834.65 h60
  text "765353" at 6870.08,2814.96 h60
Mechanical 1:
  the board outline again, w10

## Text inside footprints (layer, text, board x,y; h text height)
BT1: Top Overlay "+" at 4606.3,2460.63 h196.85 r180; Top Overlay "-" at 6259.84,2440.94 h196.85 r180